# Altium PCB PCB.PcbDoc
Units mil, origin at the board's own origin, x right, y up, seen from the top; angles counter-clockwise.
Board outline 1000 x 1270 mil, 2 copper layers (Top Layer, Bottom Layer); 14 components, 22 nets, 68 pads, 1 vias.
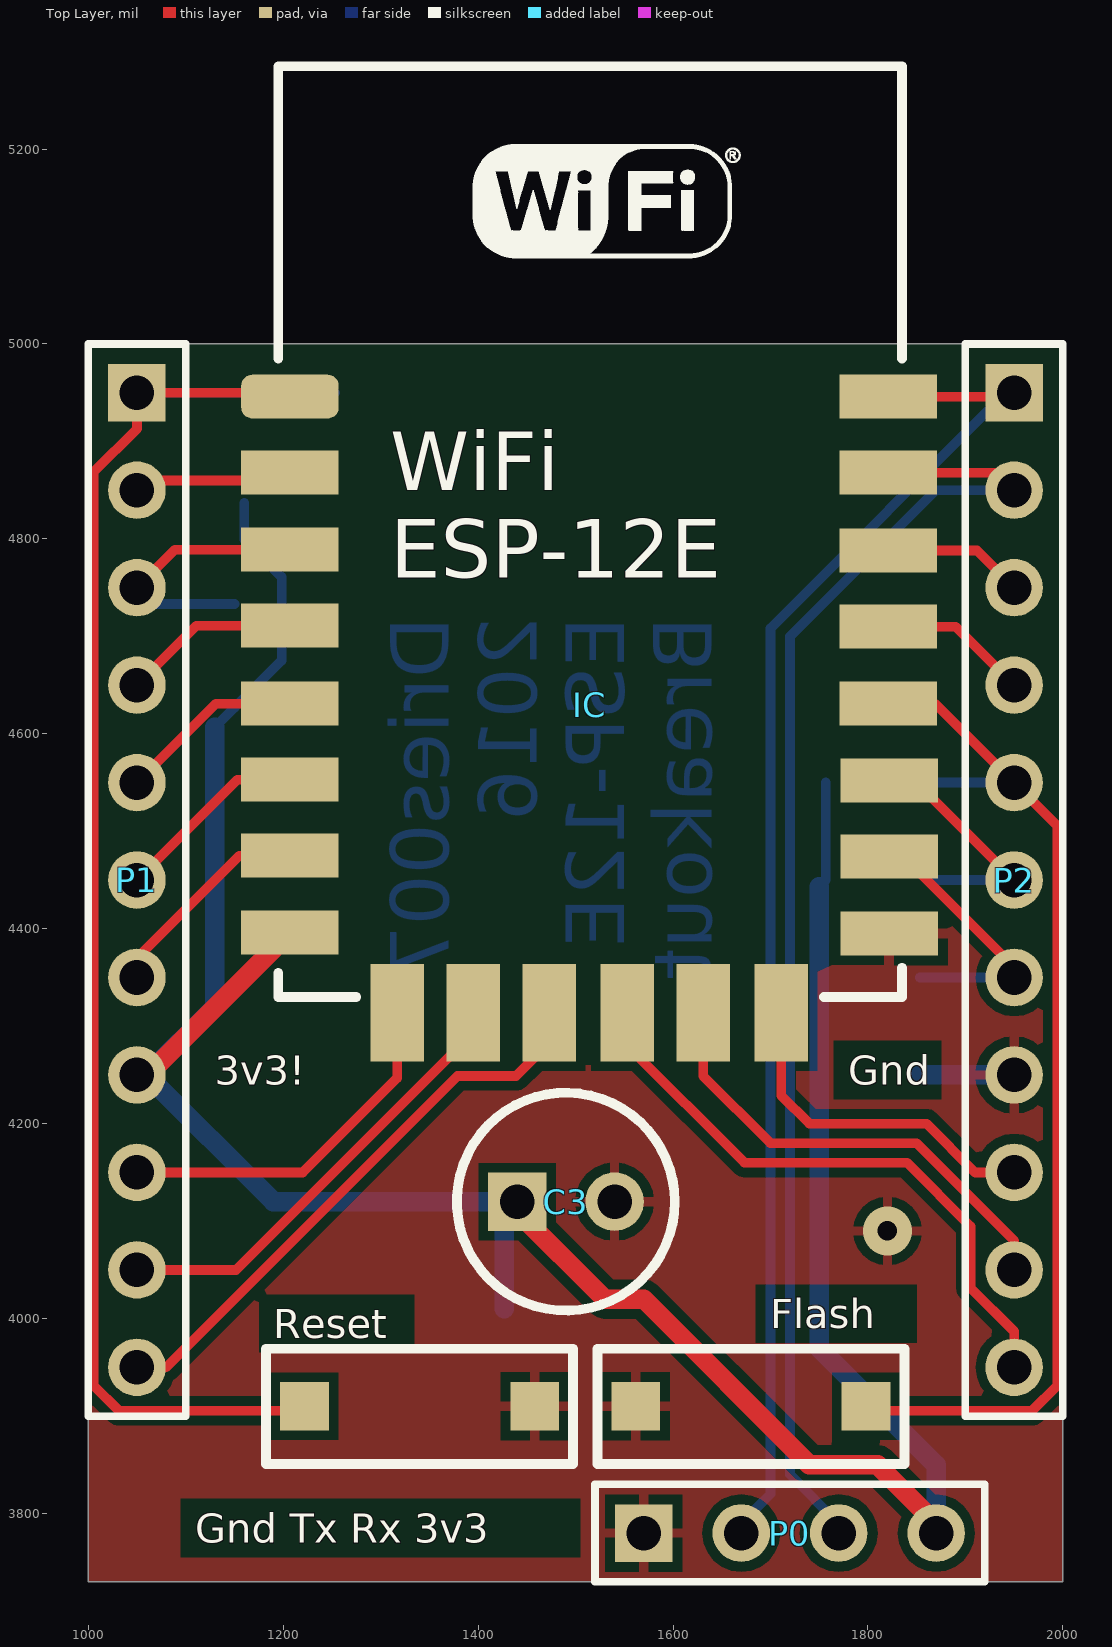
[diagram p0: Top Layer view]
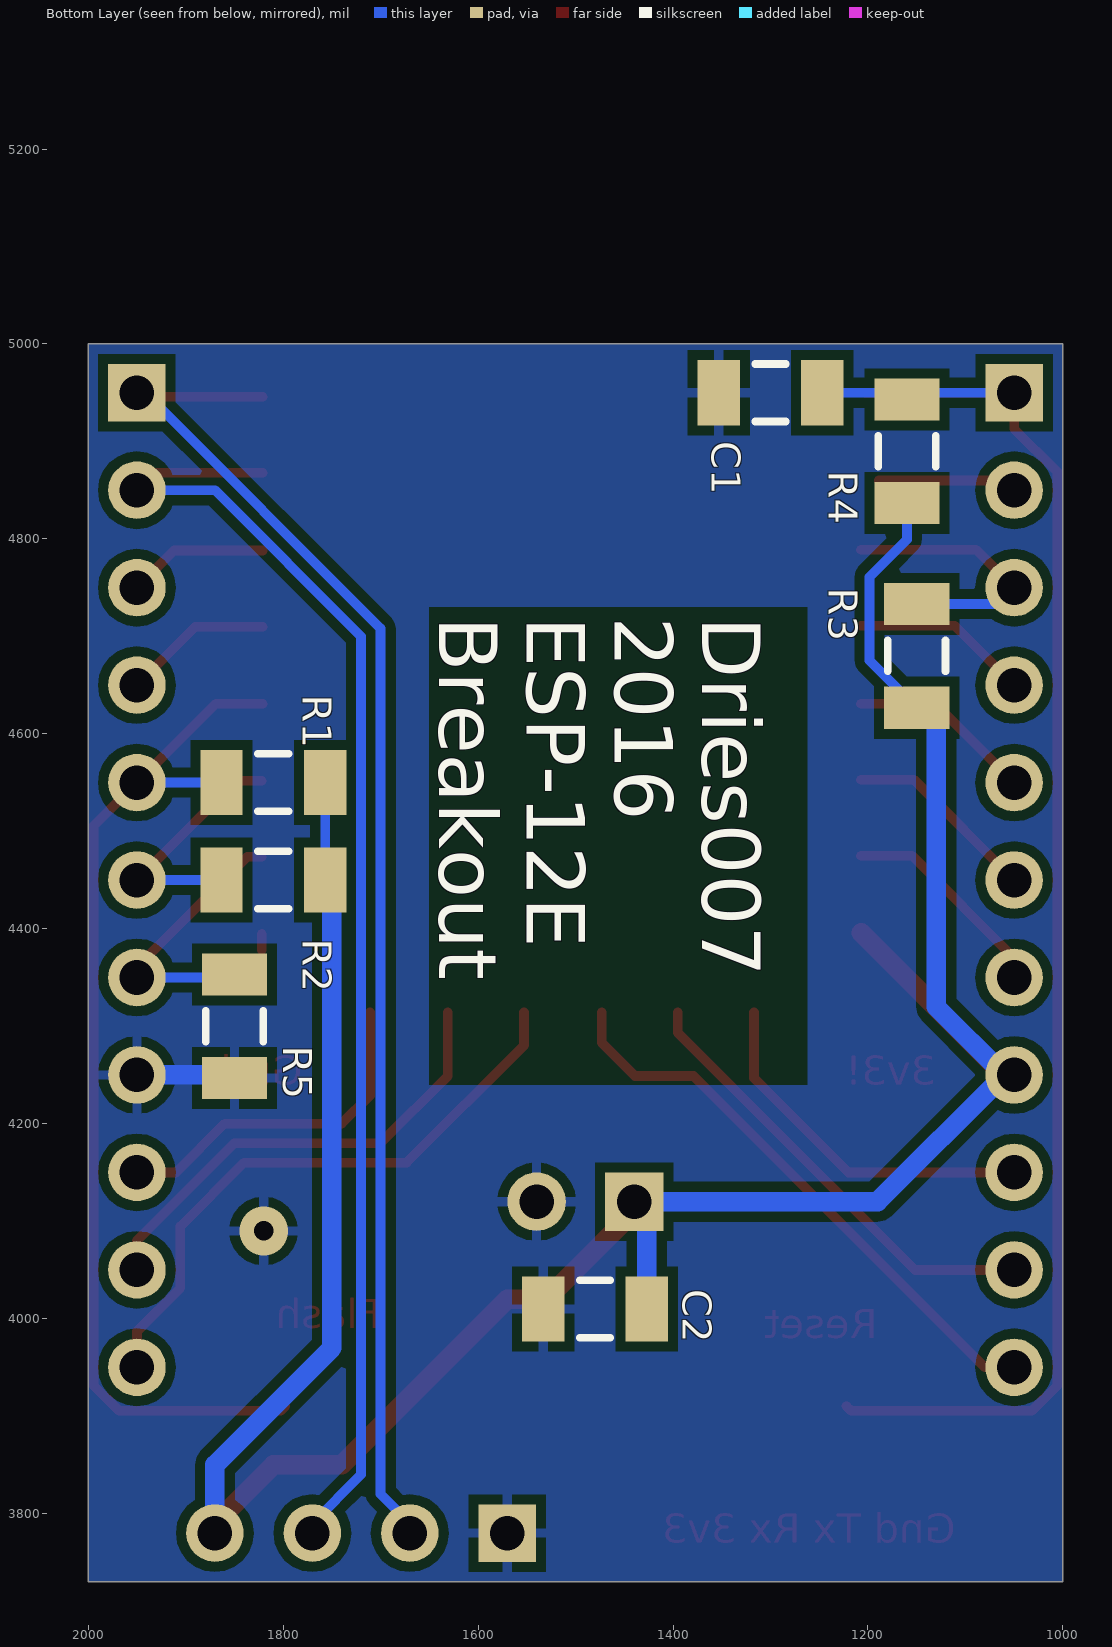
[diagram p1: Bottom Layer view, seen from below]

## Layer stack, top to bottom
Top Solder: solder mask 0.4, Solder Resist, Dk 3.5
Top Layer: signal copper 1.4
Dielectric 1: dielectric 12.6, FR-4, Dk 4.8
Bottom Layer: signal copper 1.4
Bottom Solder: solder mask 0.4, Solder Resist, Dk 3.5

## Board outline
1000,3730 1000,5000 2000,5000 2000,3730

## Design rules (kind name [scope] priority, off if disabled: settings)
Clearance [All] p1: gap=10
PolygonConnect [All] p1: connectstyle=Relief reliefconductorwidth=10 reliefentries=4 polygonreliefangle="90 Angle" airgapwidth=10
RoutingVias [All] p1: holewidth=28 width=50 viastyle="Through Hole" minholewidth=28 minwidth=50 maxholewidth=28 maxwidth=50
SolderMaskExpansion [All] p1: expansion=4
Width [All] p1: maxlimit=10 minlimit=10 preferedwidth=10
30 further rules are at their usual default settings.

## Classes and differential pairs
component class Schematic: IC

## Components (designator, comment, footprint, x,y, rotation, side; value= is the part's Value field where it differs from the comment)
C1 "Cap Semi" C1206 1300,4950 r0 bottom
C2 "Cap Semi" C1206 1480,4010 r0 bottom
C3 "" "Cap 0.1 Pol" 1490,4120 r0 top
Flash "Flash" SMDSWITCH 1680,3910 r0 top (schematic designator GPIO0)
IC "ESP8266 ESP-12-E" "ESP8266 ESP-12-E" 1860,4300 r0 top
P0 "Serial" HDR1X4 1570,3780 r0 top
P1 "Header 11" HDR1X11 1050,4950 r270 top
P2 "Header 11" HDR1X11 1950,4950 r270 top
R1 "Res2" C1206 1810,4550 r180 bottom
R2 "Res2" C1206 1810,4450 r180 bottom
R3 "Res2" C1206 1150,4680 r270 bottom
R4 "Res2" C1206 1160,4890 r270 bottom
R5 "Res2" C1206 1850,4300 r90 bottom
Reset "Reset" SMDSWITCH 1340,3910 r0 top (schematic designator RST)

## Footprints (in the part's own frame and the unit in brackets; to place one, negate y for a bottom-side part, rotate by r counter-clockwise, add the part's x,y. Pads: shape width x height; smd on the part's side, far side on the other; paste and mask are expansions set on the pad)
C1206 [mm] "Chip Capacitor, Body 3.2x1.6mm, IPC High Density"
  rect 1.1x1.7 smd: 1(-1.35,0) 2(1.35,0)
  silkscreen extent -0.4,-0.75 0.4,0.75, body extent -1.7,-0.9 1.7,0.9, height 1.3
"Cap 0.1 Pol" [mil]
  rect 60x60 hole 35.43: 1(-50,0)
  round 60 hole 35.43: 2(50,0)
  silkscreen extent -112,-112 112,112
"ESP8266 ESP-12-E" [mil] "ESP8266 ESP-12-E"
  rrect50% 100x45 smd: 1(-653,646)
  rect 100x45 smd: 2(-653,568) 3(-653,489) 4(-653,411) 5(-653,331) 6(-653,253) 7(-653,175) 8(-653,96) 15(-38,95) 16(-38,174) 17(-38,252) 18(-39,331) 19(-39,410) 20(-39,488) 21(-39,568) 22(-39,646)
  rect 55x100 smd: 9(-543,14) 10(-465,14) 11(-387,14) 12(-307,14) 13(-229,14) 14(-149,14)
  silkscreen extent -665,30 -25,985, body extent -661,37 -31,981, height 86
HDR1X4 [mm] "Connector; Header; 4 Position"
  rect 1.5x1.5 hole 0.9: 1(0,0)
  round 1.5 hole 0.9: 2(2.54,0) 3(5.08,0) 4(7.62,0)
  silkscreen extent -1.27,-1.27 8.89,1.27
HDR1X11 [mm] "Connector; Header; 11 Position"
  rect 1.5x1.5 hole 0.9: 1(0,0)
  round 1.5 hole 0.9: 2(2.54,0) 3(5.08,0) 4(7.62,0) 5(10.16,0) 6(12.7,0) 7(15.24,0) 8(17.78,0) 9(20.32,0) 10(22.86,0) 11(25.4,0)
  silkscreen extent -1.27,-1.27 26.67,1.27
SMDSWITCH [mm]
  rect 1.27x1.27 smd: 1(3,0) 2(-3,0)
  silkscreen extent -4,-1.5 4,1.5

## Part data
C1 C2: "Capacitor (Semiconductor SIM Model)"
C3: library part "Cap Pol1", "Polarized Capacitor (Radial)"
Flash Reset: library part SW-PB, "Switch"
P0: library part "Header 4", "Header, 4-Pin"
P1 P2: "Header, 11-Pin"
R1 R2 R3 R4 R5: "Resistor"

## Via types
v1: diameter 50, hole 20, Top Layer to Bottom Layer, 1 vias

## Nets (pads, with @x,y where several pads share a name; then routed paths per layer and width w, separated by ;. In a path a pad name is that pad's centre, name@x,y a point inside that pad or via, vN(x,y) a via of type N, cw(c..) or ccw(c..) an arc to the next point about the centre after c; other vN are vias at no path point)
GND: C1.2 C2.2 C3.2 Flash.2 IC.15 P0.1 P2.8 R5.1 Reset.1 | length 114.9
  Top Layer w10: IC.15@1822,4378 IC.15 ; P2.8@1950,4249 P2.8
  Bottom Layer w20: R5.1@1853.15,4250 P2.8
  other v1: 1820,4090
NetC1_1: C1.1 IC.1 P1.1 R4.1 Reset.2 | length 1622.1
  Top Layer w10: IC.1@1203,4950 P1.1 1050,4912.97 1005.47,4868.44 1005.47,3931.56 1031.56,3905.47 1217.36,3905.47 Reset.2
  Bottom Layer w10: P1.1 C1.1 C1.1@1253.15,4950
NetGPIO0_1: Flash.1 IC.18 P2.5 R1.1 | length 1095.4
  Top Layer w10: Flash.1 1802.64,3905.47 1968.44,3905.47 1994.53,3931.56 1994.53,4505.47 P2.5 1869,4631 IC.18
  Bottom Layer w10: R1.1 P2.5
NetIC_2: IC.2 P1.2 | length 139
  Top Layer w10: P1.2@1050,4860 IC.2@1189,4860
NetIC_3: IC.3 P1.3 R3.1 | length 280.1
  Top Layer w10: P1.3 1089,4789 IC.3
  Bottom Layer w10: P1.3 1066.85,4733.15 R3.1
NetIC_4: IC.4 P1.4 | length 182.3
  Top Layer w10: P1.4 1111,4711 IC.4
NetIC_5: IC.5 P1.5 | length 190.6
  Top Layer w10: P1.5 1131,4631 IC.5
NetIC_6: IC.6 P1.6 | length 199.7
  Top Layer w10: P1.6 1153,4553 IC.6
NetIC_7: IC.7 P1.7 | length 220.5
  Top Layer w10: P1.7 1050,4370 1155,4475 IC.7
NetIC_9: IC.9 P1.9 | length 381.6
  Top Layer w10: P1.9@1050,4142.56 P1.9 1220,4150 1317,4247 IC.9
NetIC_10: IC.10 P1.10 | length 466.5
  Top Layer w10: P1.10 1151.71,4050 1395,4293.29 IC.10
NetIC_11: IC.11 P1.11 | length 611
  Top Layer w10: P1.11@1050,3969.09 P1.11 1080,3950 1379,4249 1439,4249 1473,4283 IC.11
NetIC_12: IC.12 P2.11 | length 626
  Top Layer w10: IC.12 1553,4280.43 1673.43,4160 1840,4160 1905.47,4094.53 1905.47,4031.56 1950,3987.03 P2.11
NetIC_13: IC.13 P2.10 | length 484
  Top Layer w10: IC.13 1631,4249 1700,4180 1850,4180 1950,4080 P2.10
NetIC_14: IC.14 P2.9 | length 356.8
  Top Layer w10: IC.14 1711,4228.91 1739.91,4200 1860,4200 1910,4150 P2.9
NetIC_16: IC.16 P2.7 R5.2 | length 304.7
  Top Layer w10: IC.16 1836.71,4474 1946,4364.71 P2.7@1946,4350
  Bottom Layer w10: R5.2@1853.15,4350 P2.7 P2.7@1933.15,4333.15
NetIC_17: IC.17 P2.6 R2.1 | length 257.1
  Top Layer w10: IC.17 1848,4552 P2.6
  Bottom Layer w10: R2.1 P2.6
NetIC_19: IC.19 P2.4 | length 153.9
  Top Layer w10: IC.19 1890,4710 P2.4
NetIC_20: IC.20 P2.3 | length 144.7
  Top Layer w10: IC.20 1912,4788 P2.3
NetIC_21: IC.21 P0.3 P2.2 | length 1359.3
  Top Layer w10: IC.21 1932,4868 P2.2
  Bottom Layer w10: P0.3@1770,3790 1720,3840 1720,4700 1870,4850 P2.2
NetIC_22: IC.22 P0.2 P2.1 | length 1405.8
  Top Layer w10: IC.22 P2.1@1946,4946
  Bottom Layer w10: P0.2@1670,3790 1700,3820 1700,4708.28 1941.72,4950 P2.1
VDD: C2.1 C3.1 IC.8 P0.4 P1.8 R1.2 R2.2 R3.2 R4.2 | length 2807.5
  Top Layer w10: P1.8@1050,4240 P1.8 P1.8@1061,4250
  Top Layer w20: P1.8@1061,4250 IC.8 ; C3.1@1440,4110 1530,4020 1570,4020 1740,3850 1810,3850 P0.4@1870,3790
  Bottom Layer w10: P1.8 P1.8@1060,4250 ; R3.2@1130,4606.85 R3.2 1198.46,4675.31 1198.46,4761.02 1160,4799.48 R4.2 ; C3.1@1430,4120 C3.1@1440,4110 ; R2.2@1750,4443.15 R2.2 R1.2
  Bottom Layer w20: R3.2@1130,4606.85 1130,4320 1060,4250 1190,4120 C3.1@1430,4120 ; C2.1 C3.1@1426.85,4106.85 ; R2.2@1750,4443.15 1750,3970 1870,3850 P0.4@1870,3790

## Polygon pours and split planes (outlines as drawn)
GND on Bottom Layer "Bottom_GND" (solid, remove dead copper, pour order 3): 1000,3730 2000,3730 2000,5000 1000,5000
GND on Top Layer "Top_GND" (solid, remove dead copper, pour order 4): 1000,3730 2000,3730 2000,5000 1000,5000

## Other copper
Top Layer:
  pour cut-out: 1270,4370 1500,4260 1530,4260 1780,4370 1780,4990 1270,4990 1277,4983
  text "3v3!" at 1130,4240 h30
  text "Gnd" at 1780,4240 h30
  text "Flash" at 1700,3990 h30
  text "Reset" at 1190,3980 h30
  text "Gnd Tx Rx 3v3" at 1110,3770 h30
Bottom Layer:
  text "Dries007 / 2016 / ESP-12E / Breakout" at 1640,4720 h60 r90

## Silkscreen, mask and mechanical layers (free items; w line width, h text height)
Top Overlay:
  text "WiFi / ESP-12E" at 1310,4760 h60
  text "3v3!" at 1130,4240 h30
  text "Gnd" at 1780,4240 h30
  text "Gnd Tx Rx 3v3" at 1110,3770 h30
Bottom Overlay:
  text "Dries007 / 2016 / ESP-12E / Breakout" at 1640,4720 h60 r90
Mechanical 15:
  the board outline again, w10

## Text inside footprints (layer, text, board x,y; h text height)
IC: Mechanical 13 "CUTOUT POLYGON" at 1207.04,5240.59 h10; Mechanical 13 "ANTENNA AREA" at 1207.04,5260.59 h10